# Altium PCB MachNhan.PcbDoc
Units mil, origin at the board's own origin, x right, y up, seen from the top; angles counter-clockwise.
Board outline 3185.03 x 3296.15 mil, 2 copper layers (Top Layer, Bottom Layer); 54 components, 34 nets, 165 pads, 26 vias.
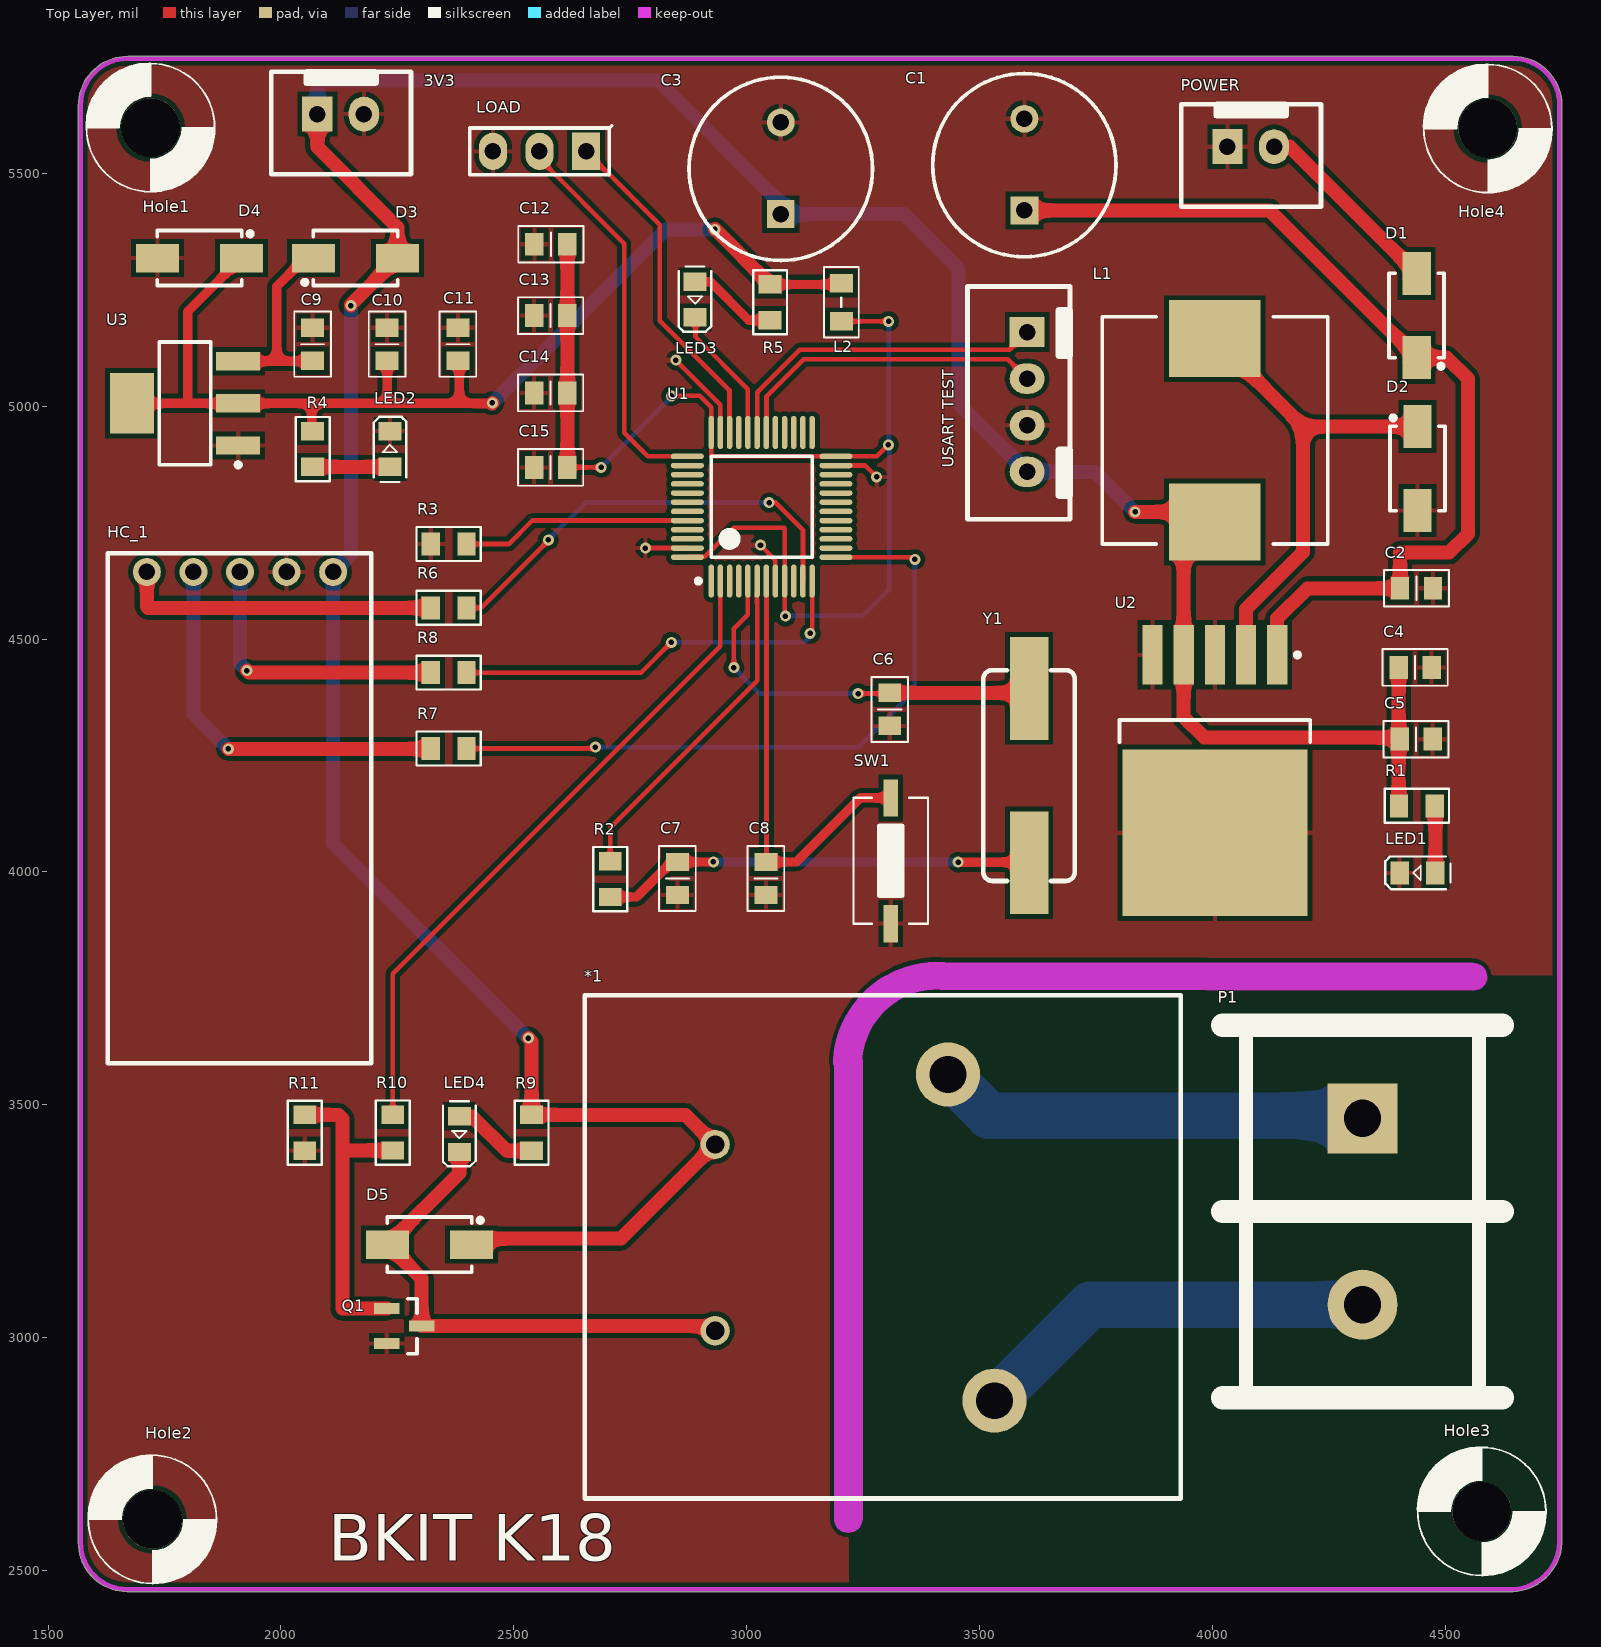
[diagram p0: Top Layer view]
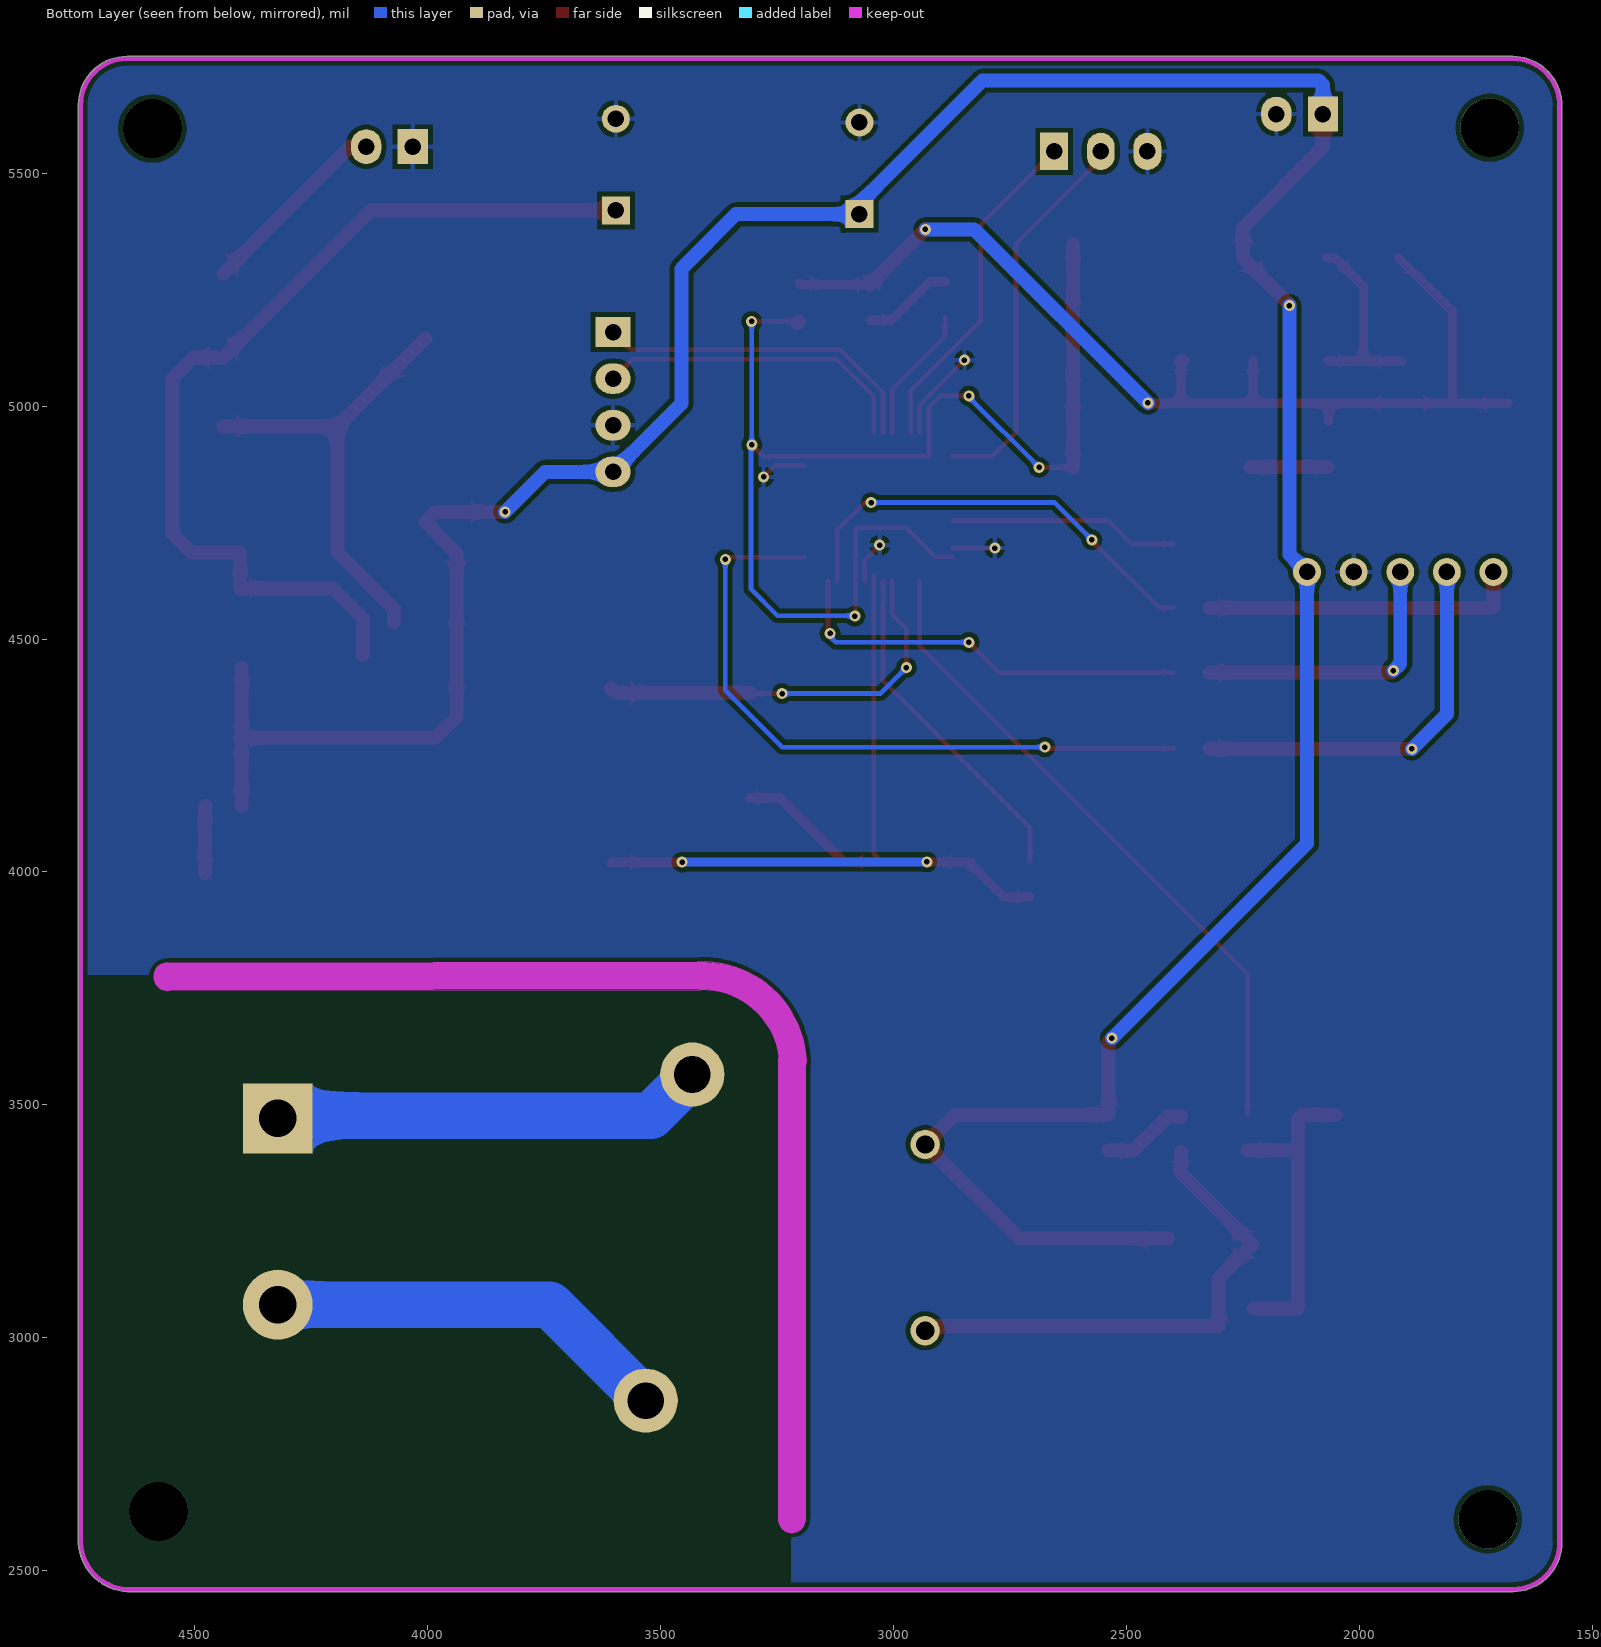
[diagram p1: Bottom Layer view, seen from below]
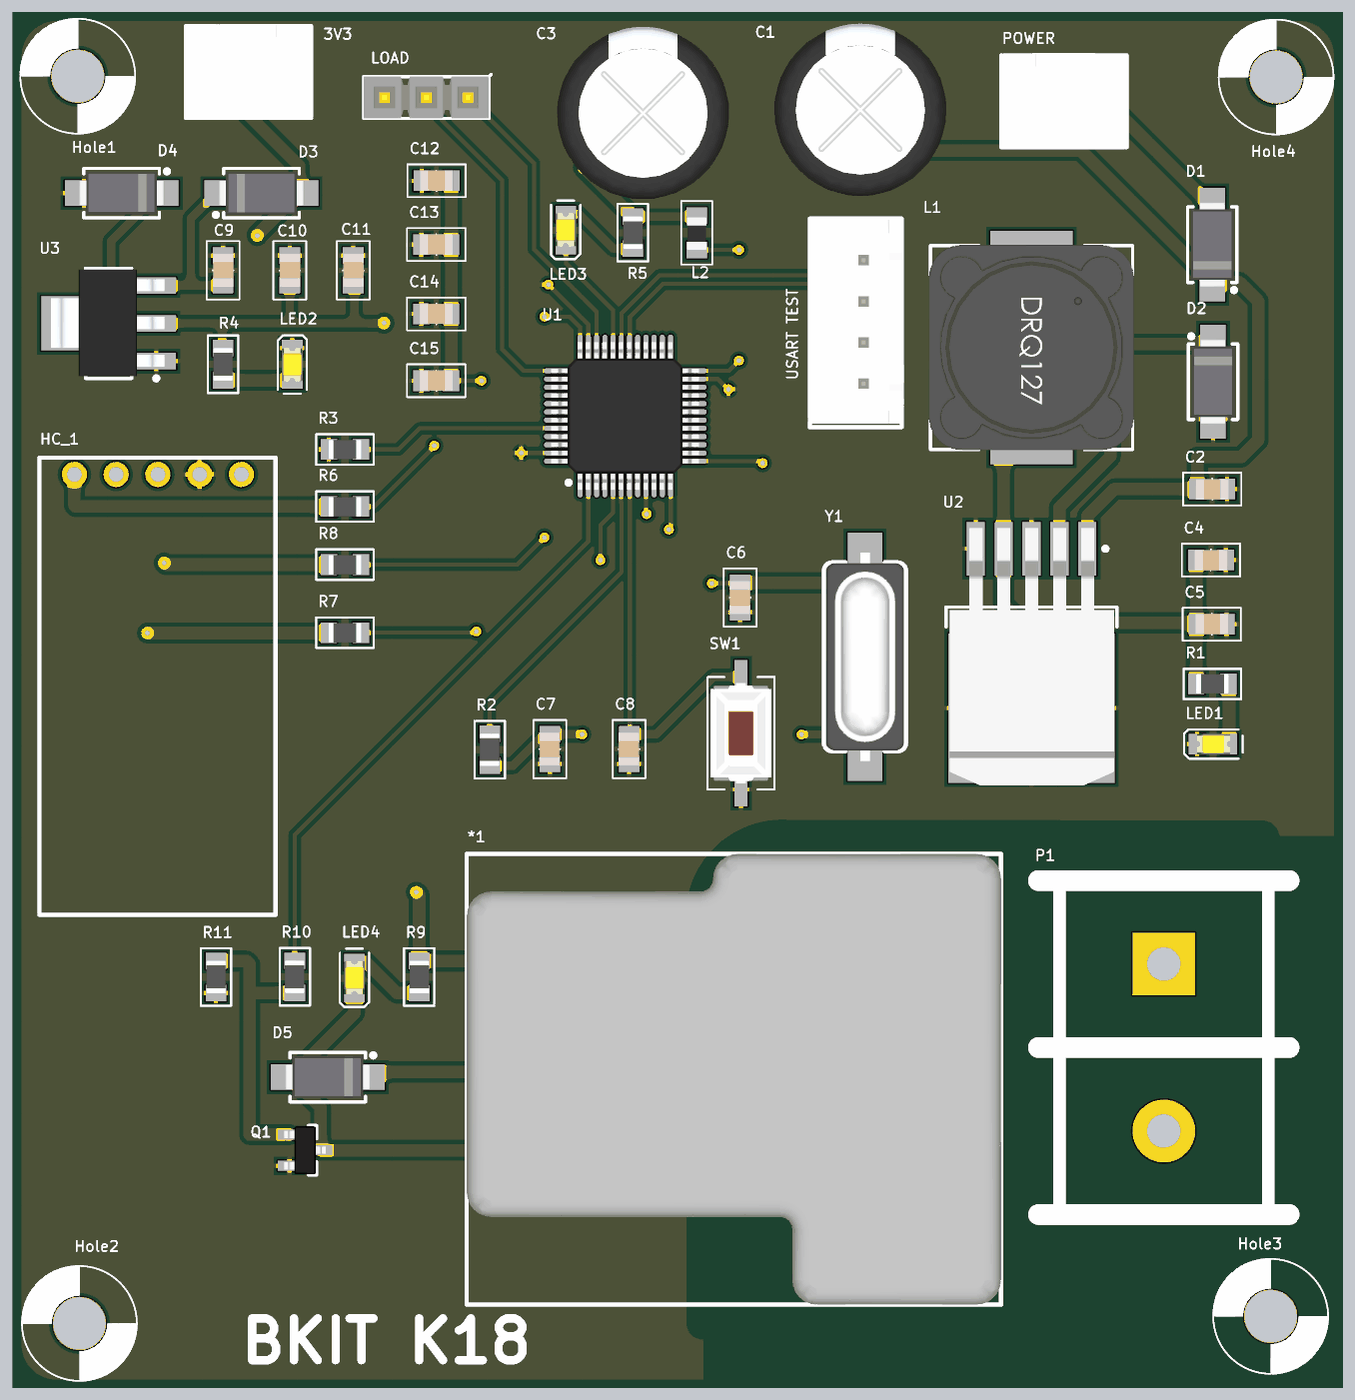
[diagram p2: 3D render of the assembled board from above, using the file's embedded part models]

## Layer stack, top to bottom
Top Solder: solder mask 0.4, Solder Resist, Dk 3.5
Top Layer: signal copper 1.4
Dielectric 1: dielectric 12.6, FR-4, Dk 4.8
Bottom Layer: signal copper 1.4
Bottom Solder: solder mask 0.4, Solder Resist, Dk 3.5

## Board outline
1670,2454.99 cw(c1670,2560) 1564.98,2560 1564.98,5645 cw(c1671,5645) 1671,5751.02 4645,5751.02 cw(c4645,5646) 4750.01,5646 4750.02,2560 cw(c4745,2560) 4750.01,2559.76 cw(c4640,2565) 4645.24,2454.99 cw(c4640,2565) 4634.88,2454.99
cut-out: 3188.46,3583.57 cw(c3216,3594.25) 3186.5,3595.87 cw(c3409.37,3583.63) 3420.91,3806.54 4559.05,3804.54 cw(c4559,3775) 4588.54,3775 cw(c4559,3775) 4558.95,3745.46 3416.95,3747.46 cw(c3417,3777) 3413.18,3747.7 ccw(c3409.37,3583.63) 3246.43,3603.28 cw(c3218,3595.25) 3247.54,3595.25 3247.54,2611 cw(c3218,2611) 3188.46,2611

## Design rules (kind name [scope] priority, off if disabled: settings)
Clearance [All] p1: gap=10 ignorepadtopadclearanceinfootprint=FALSE except(0: Arc-Hole Track-Hole SMDPad-Hole THPad-Hole Via-Hole Fill-Hole Poly-Hole Region-Hole Text-Hole; 5: SMDPad-SMDPad SMDPad-THPad; 8: Arc-Arc Arc-Track Arc-SMDPad Track-Track Track-SMDPad)
PolygonConnect [All] p1: connectstyle=Relief reliefconductorwidth=10 reliefentries=4 polygonreliefangle="90 Angle" airgapwidth=10
RoutingVias [All] p1: holewidth=11.81 width=23.62 viastyle="Through Hole" minholewidth=11.81 minwidth=23.62 maxholewidth=11.81 maxwidth=23.62
SolderMaskExpansion [All] p1: expansion=4
Width [All] p1: maxlimit=30 minlimit=10 preferedwidth=10
30 further rules are at their usual default settings.

## Components (designator, comment, footprint, x,y, rotation, side; value= is the part's Value field where it differs from the comment)
3V3 "JP2" "CON Header 2" 2278,5627 r0 top value="Connector 2"
*1 "Relay_4Pin" "Relay4 - duplicate" 3132,2515 r90 top
C1 "470uF/50V" CR/D.10.0x16.0/P.5.0 3596,5420.15 r90 top
C2 "100nF" "C 0805 (2012)" 4438.02,4609 r0 top
C3 "1000uF/16V" CR/D.10.0x12.5/P.5.0 3073,5412.15 r90 top
C4 "100nF" "C 0805 (2012)" 4434.97,4439 r0 top
C5 "100nF" "C 0805 (2012)" 4437.03,4285 r180 top
C6 "22pF" "C 0805 (2012)" 3307,4349 r270 top
C7 "22pF" "C 0805 (2012)" 2851,3986 r270 top
C8 "100nF" "C 0805 (2012)" 3041,3986 r270 top
C9 "10uF" "C 0805 (2012)" 2068,5133 r90 top
C10 "10uF" "C 0805 (2012)" 2228,5133 r90 top
C11 "100nF" "C 0805 (2012)" 2380,5133 r90 top
C12 "100nF" "C 0805 (2012)" 2579.45,5347.53 r180 top
C13 "100nF" "C 0805 (2012)" 2579,5194.53 r180 top
C14 "100nF" "C 0805 (2012)" 2579,5028.53 r180 top
C15 "10uF" "C 0805 (2012)" 2579,4868.53 r180 top
D1 "SS34" "DO-214AC (SMA)" 4438.02,5194.53 r270 top
D2 "SS34" "DO-214AC (SMA)" 4439.98,4866 r90 top
D3 "SS14" "DO-214AC (SMA)" 2160,5318 r180 top
D4 "SS14" "DO-214AC (SMA)" 1825,5318 r0 top
D5 "M7" "DO-214AC (SMA)" 2319,3200 r0 top
HC_1 "Header 5" HC_12 1412,4744 r270 top
Hole1 "3mm" SCREW/3M/7M 1720,5598 r0 top
Hole2 "3mm" SCREW/3M/7M 1724,2610 r0 top
Hole3 "3mm" SCREW/3M/7M 4578,2627 r0 top
Hole4 "3mm" SCREW/3M/7M 4591,5596 r0 top
L1 "100uH" "Inductor SMD 12x12x8" 4005,4948 r270 top value="150 mH"
L2 "600 Ohm" "Inductor SMD 0805 (2012)" 3203,5223 r90 top
LED1 "Red Led" "Led SMD 0805" 4441.03,3998 r180 top
LED2 "Blue Led" "Led SMD 0805" 2234,4907 r90 top
LED3 "Blue Led" "Led SMD 0805" 2889,5230 r270 top
LED4 "Blue Led" "Led SMD 0805" 2383,3438 r270 top
LOAD "Header 3" "Header 3" 2655,5547 r180 top
P1 "Header 2" "HDR Terminal 2" 4322,3471 r270 top
POWER "Header 2" "CON Header 2" 4232,5557 r0 top
Q1 "C1815" SOT-23 2264.6,3025 r0 top
R1 "10k" "R 0805 (2012)" 4438.61,4142 r180 top
R2 "330" "R 0805 (2012)" 2707,3984.55 r270 top
R3 "10k" "R 0805 (2012)" 2360,4704 r0 top
R4 "4k7" "R 0805 (2012)" 2068,4908 r90 top
R5 "2k2" "R 0805 (2012)" 3050,5223 r90 top
R6 "4.7k" "R 0805 (2012)" 2360,4567 r0 top
R7 "4.7k" "R 0805 (2012)" 2360,4265 r0 top
R8 "4.7k" "R 0805 (2012)" 2360,4428 r0 top
R9 "10k" "R 0805 (2012)" 2538,3440 r90 top
R10 "4k7" "R 0805 (2012)" 2240,3440.42 r270 top
R11 "47k" "R 0805 (2012)" 2051,3440 r90 top
SW1 "Button" SW/2/SMD 3309,4024 r90 top
U1 "STM32F103C8T6" LQFP48_N 3032,4784 r90 top
U2 "LM2596S-5.0" TO-263-5 4005,4217.97 r270 top
U3 "AMS1117-3V3" SOT-223 1794,5006 r90 top
"USART TEST" "Header 4" "CON Header 4" 3631,4960 r270 top
Y1 "8Mhz" "Crystal HC49US SMD" 3606,4207 r90 top

## Footprints (in the part's own frame and the unit in brackets; to place one, negate y for a bottom-side part, rotate by r counter-clockwise, add the part's x,y. Pads: shape width x height; smd on the part's side, far side on the other; paste and mask are expansions set on the pad)
"C 0805 (2012)" [mm] "Chip Capacitor, 2-Leads, Body 2.0x1.3mm, IPC Medium Density"
  rect 1x1.25 smd: 1(-0.9,0) 2(0.9,0)
  silkscreen extent -1.78,-1 1.78,1, body extent -1,-0.64 1,0.61, height 0.6
"CON Header 2" [mil]
  rect 65x75 hole 35.43: 1(-200,0)
  oval 65x75 hole 35.43: 2(-100,0)
  silkscreen extent -299,-129 1,96, body extent -297,-134 -2,94, height 286
"CON Header 4" [mil]
  rect 65x75 hole 35.43: 1(-199,-29)
  oval 65x75 hole 35.43: 2(-99,-29) 3(1,-29) 4(101,-29)
  silkscreen extent -297,-157 203,68, body extent -294,-162 195,64, height 290
CR/D.10.0x12.5/P.5.0 [mil]
  rect 60x60 hole 35.43: 1(0,0)
  round 60 hole 35.43: 2(196.85,0)
  silkscreen extent -100,-197 294,197, body extent -109,-208 304,205, height 551
CR/D.10.0x16.0/P.5.0 [mil]
  rect 60x60 hole 35.43: 1(0,0)
  round 60 hole 35.43: 2(196.85,0)
  silkscreen extent -100,-197 294,197, body extent -110,-206 304,208, height 689
"Crystal HC49US SMD" [mil]
  rect 220.47x82.67 smd: 1(-187,0) 2(187,0)
  silkscreen extent -226,-98 226,98, body extent -250,-93 250,92, height 165
"DO-214AC (SMA)" [mm] "Molded Diode, 2-Leads, Body 4.3x2.7mm, IPC Medium Density"
  rect 2.35x1.55 smd: 1(-2.286,0) 2(2.286,0)
  silkscreen extent -2.3,-1.5 2.89,1.5, body extent -2.6,-1.3 2.6,1.3, height 2.4
HC_12 [mil]
  round 60 hole 35.43: 1(100,700) 2(100,600) 3(100,500) 4(100,400) 5(100,300)
  silkscreen extent 60,216 1155,782
"HDR Terminal 2" [mil]
  rect 150x150 hole 80: 1(0,0)
  round 150 hole 80: 2(400,0)
  silkscreen extent -200,-300 600,300
"Header 3" [mil]
  rect 60x80 hole 35.43: 1(0,0)
  oval 60x80 hole 35.43: 2(100,0) 3(200,0)
  silkscreen extent -55,-55 250,50, body extent -50,-50 250,50, height 350
"Inductor SMD 12x12x8" [mm] "Precision Wire Wound Inductor, 2-Leads, Body 12.3x12.3mm, IPC Low Density"
  rect 4.2x5 smd: 1(-5,0) 2(5,0)
  silkscreen extent -6.2,-6.15 6.2,6.15, body extent -6.25,-6.25 6.25,6.25, height 8.01
"Inductor SMD 0805 (2012)" [mm] "Precision Wire Wound Inductor, 2-Leads, Body 2.0x1.2mm, IPC Medium Density"
  rect 1x1.25 smd: 1(-1.041,0) 2(1.041,0)
  silkscreen extent -1.92,-0.95 1.92,0.95, body extent -1.05,-0.6 0.95,0.6, height 0.95
"Led SMD 0805" [mm] "Led SMD 0805"
  rect 1x1.25 smd: 1(-0.95,0) 2(1,0)
  silkscreen extent -1.78,-0.89 1.78,0.89, body extent -1.01,-0.62 1.01,0.63, height 1.1
LQFP48_N [mm] "Thin QFP, 48-Leads, Body 7x7mm, Pitch 0.5mm, IPC Medium Density"
  oval 1.8x0.3 smd: 1(-4.05,2.75) 2(-4.05,2.25) 3(-4.05,1.75) 4(-4.05,1.25) 5(-4.05,0.75) 6(-4.05,0.25) 7(-4.05,-0.25) 8(-4.05,-0.75) 9(-4.05,-1.25) 10(-4.05,-1.75) 11(-4.05,-2.25) 12(-4.05,-2.75) 25(4.05,-2.75) 26(4.05,-2.25) 27(4.05,-1.75) 28(4.05,-1.25) 29(4.05,-0.75) 30(4.05,-0.25) 31(4.05,0.25) 32(4.05,0.75) 33(4.05,1.25) 34(4.05,1.75) 35(4.05,2.25) 36(4.05,2.75)
  oval 0.3x1.8 smd: 13(-2.75,-4.05) 14(-2.25,-4.05) 15(-1.75,-4.05) 16(-1.25,-4.05) 17(-0.75,-4.05) 18(-0.25,-4.05) 19(0.25,-4.05) 20(0.75,-4.05) 21(1.25,-4.05) 22(1.75,-4.05) 23(2.25,-4.05) 24(2.75,-4.05) 37(2.75,4.05) 38(2.25,4.05) 39(1.75,4.05) 40(1.25,4.05) 41(0.75,4.05) 42(0.25,4.05) 43(-0.25,4.05) 44(-0.75,4.05) 45(-1.25,4.05) 46(-1.75,4.05) 47(-2.25,4.05) 48(-2.75,4.05)
  silkscreen extent -4.17,-2.75 2.75,3.57, body extent -4.5,-4.47 4.5,4.53, height 1.6
"R 0805 (2012)" [mm] "Chip Resistor, 2-Leads, Body 2.0x1.3mm, IPC Medium Density"
  rect 1x1.25 smd: 1(-0.975,0) 2(0.975,0)
  silkscreen extent -1.75,-0.92 1.75,0.92, body extent -1,-0.61 1,0.59, height 0.5
"Relay4 - duplicate" [mm]
  round 1.6 hole 1: 1(22.86,5.08) 2(12.7,5.08)
  round 3.5 hole 2: 3(26.67,-7.62) 4(8.89,-10.16)
  silkscreen extent 3.56,-20.32 30.99,12.19, body extent 3.56,-20.32 30.99,12.19, height 2.21
SCREW/3M/7M [mm]
  round 3.2 hole 3.2: 1(0,0)
  silkscreen extent -3.54,-3.53 3.53,3.54
SOT-23 [mm] "SOT23, 3-Leads, Body 3.0x2.5mm (max), Pitch 0.95mm, IPC Medium Density"
  rect 1.4x0.6 smd: 1(-0.95,0.95) 2(-0.95,-0.95) 3(0.95,0)
  silkscreen extent 0.2,-1.5 0.7,1.5, body extent -1.28,-1.46 1.27,1.46, height 0.95
SOT-223 [mm] "SOT223, 4-Leads, Body 6.5x3.5mm, Pitch 2.3mm, Lead Span 7mm, IPC Medium Density"
  rect 1x2.4 smd: 1(-2.3,-2.9) 2(0,-2.9) 3(2.3,-2.9)
  rect 3.3x2.4 smd: 2(0,2.9)
  silkscreen extent -3.47,-3.03 3.35,1.4, body extent -3.23,-3.39 3.27,3.5, height 1.72
SW/2/SMD [mil]
  rect 80x31.5 smd: 1(-135,0) 2(135,0)
  silkscreen extent -135,-80 135,80, body extent -120,-73 120,73, height 98
TO-263-5 [mm] "D2-PAK, 6-Pads, Body 8.9x10.4mm (max), IPC Medium Density"
  rect 3.25x1.1 smd: 1(-6.3,3.4) 2(-6.3,1.7) 3(-6.3,0) 4(-6.3,-1.7) 5(-6.3,-3.4)
  rect 9.1x10.1 smd: 6(3.4,0)
  silkscreen extent -6.42,-5.2 -1.55,5.2, body extent -7.56,-4.98 8.11,5.02, height 4.83

## Part data
3V3: library part Con2, "Connector 2"
C1 C3: library part Capacitor, "Capacitor pol"
C2 C4 C5 C6 C7 C8 C9 C10 C11 C12 C13 C14 C15: library part "Capacitor NP", "Capacitor non-pol"
D1 D2 D3 D4: library part "Diode Schottky", "Schottky Diode", Code_JEDEC=DO-214-AA, LatestRevisionDate=17-Jul-2002, LatestRevisionNote="Re-released for DXP Platform.", PackageReference=SMB, Published=8-Jun-2000, Publisher="Altium Limited"
D5: library part Diode, "Default Diode", Code_JEDEC=DO-214-AB, LatestRevisionDate=17-Jul-2002, LatestRevisionNote="Re-released for DXP Platform.", PackageReference=SMC, PackageVersion=Sep-1996, Published=8-Jun-2000, Publisher="Altium Limited"
HC_1: library part HC_12, "Header, 5-Pin", LatestRevisionDate=17-Jul-2002, LatestRevisionNote="Re-released for DXP Platform.", Publisher="Altium Limited"
Hole1 Hole2 Hole3 Hole4: library part Screw
L1: library part L1, "Inductor"
L2: library part Inductor, "Inductor"
LED1 LED2 LED3 LED4: library part Led, "Typical LED"
LOAD: "Header, 3-Pin"
P1 POWER: "Header, 2-Pin", LatestRevisionDate=17-Jul-2002, LatestRevisionNote="Re-released for DXP Platform.", Publisher="Altium Limited"
Q1: library part "Transistor NPN", "NPN Bipolar Transistor"
R1 R2 R3 R4 R5 R6 R7 R8 R9 R10 R11: library part Resistor, "Resistor", LatestRevisionDate=17-Jul-2002, LatestRevisionNote="Re-released for DXP Platform.", PackageReference=AXIAL-0.3, Published=8-Jun-2000, Publisher="Altium Limited"
SW1: library part "SW SPST", "Tact switch 2 pin"
U1: "STM32 ARM-based 32-bit MCU with 64 Kbytes Flash, 48-pin LQFP, Industrial Temperature", ComponentLink1Description="Manufacturer Link", ComponentLink1URL=www.st.com/stm32, ComponentLink2Description=Datasheet, ComponentLink2URL=http://www.st.com/stonline/products/literature/ds/13587.pdf, DatasheetVersion="rev6, Mar-2008", PackageDescription="48-Pin Low-Profile Quad Flat Pack, 7 x 7 mm Body, 0.5 mm Pitch (LQFP48)", PackageReference=LQFP48, PackageVersion=Mar-2008, Published=30-May-2008, Publisher="Altium Limited"
U2: library part LM2576/96, "SIMPLE SWITCHER® 3A Step-Down Voltage Regulator"
U3: library part AMS1117, "1A LDO Voltage Regulator, ADJ or fixed 1.5/1.8/2.5/2.85/3.3/5V"
"USART TEST": "Header, 4-Pin"
Y1: library part Crystal

## Via types
v1: diameter 23.62, hole 11.81, Top Layer to Bottom Layer, 26 vias

## Nets (pads, with @x,y where several pads share a name; then routed paths per layer and width w, separated by ;. In a path a pad name is that pad's centre, name@x,y a point inside that pad or via, vN(x,y) a via of type N, cw(c..) or ccw(c..) an arc to the next point about the centre after c; other vN are vias at no path point)
3V3: C10.1 C11.1 D4.2 L2.2 R4.2 R5.2 U3.2 | length 2302.1
  Top Layer w20: U3.2@1679.83,5006 1908.17,5006 2066,5006 ; 1800,5015 1800,5203 D4.2 ; 2066,4967.39 2066,5006 ; C10.1 2228,5006 ; C11.1@2382.88,5094.69 2382.88,5006 ; v1@2453,5006 2382.88,5006 ; R5.2 3200.39,5261.39 L2.2 ; 2066,5006 2228,5006 ; 2228,5006 2382.88,5006
  Top Layer w30: C11.1 C11.1@2382.88,5094.69 ; v1@2453,5006 v1(2454,5007) ; v1(2931.39,5379.61) 2931.39,5380 R5.2
  Bottom Layer w30: v1(2454,5007) 2826.61,5379.61 v1(2931.39,5379.61)
9V: D1.1 POWER.2 | length 418.9
  Top Layer w30: POWER.2 4165.54,5557 D1.1
DEBUG_LED: LED3.2 U1.32 | length 335.8
  Top Layer w10: U1.32 3002.47,5036.53 2890,5149 ; 2890,5149 2890,5189.61 LED3.2 2890,5149
GND: 3V3.2 "USART TEST.3" C1.2 C2.2 C3.2 C4.2 C5.1 C6.2 C7.2 C8.2 C9.2 C10.2 C11.2 C12.2 C13.2 C14.2 C15.2 D2.1 D4.1 HC_1.2 LED1.2 LED2.2 LOAD.3 POWER.1 Q1.2 R3.1 R11.1 SW1.1 U1.8 U1.23 U1.35 U1.47 U2.3 U2.5 U2.6 U3.1 | length 472.8
  Top Layer w10: v1(2782.58,4695.42) U1.47 ; v1(2847.73,5098.73) 2943.42,5003.04 U1.35 ; v1(3029.5,4701.5) 3061.53,4669.47 U1.8 ; U1.23 3254.42,4872.58 v1(3279,4848)
HC_12_RX: R8.2 U1.12 | length 891
  Top Layer w10: R8.2 2773,4428 v1(2838,4493) ; v1(3136.17,4512) 3140.58,4516.42 U1.12@3140.58,4624.55
  Bottom Layer w10: v1(2838,4493) 3124,4493 3136.17,4505.17 v1(3136.17,4512)
HC_12_SET: R6.2 U1.11 | length 951.1
  Top Layer w10: R6.2 2430,4567 2574,4711 v1(2574,4713) ; v1(3048,4793) 3062,4793 3120.58,4734.42 U1.11
  Bottom Layer w10: v1(2574,4713) 2654,4793 v1(3048,4793)
HC_12_TX: R7.2 U1.13 | length 1466.9
  Top Layer w10: R7.2 2672,4265 v1(2675,4268) ; U1.13 3356.27,4675.73 v1(3361,4671)
  Bottom Layer w10: v1(2675,4268) 3239,4268 3361,4390 v1(3361,4671)
Net*1_2: *1.2 D5.1 LED4.2 Q1.3 | length 1101.8
  Top Layer w30: LED4.2 2383,3354 D5.1 2302,3127 Q1.3 2922,3025 *1.2
Net*1_3: *1.3 P1.1 | length 941.8
  Top Layer w100: P1.1@4302,3477 P1.1@4327,3452
  Bottom Layer w100: *1.3 3520,3477 P1.1@4302,3477
Net*1_4: *1.4 P1.2 | length 888.7
  Top Layer w100: *1.4@3532,2861 3533.2,2861.4 *1.4@3538,2863 ; P1.2 P1.2@4329,3071
  Bottom Layer w100: *1.4 3738,3071 P1.2
NetC6_1: C6.1 U1.5 Y1.2 | length 859.7
  Top Layer w10: v1(2972.28,4438.72) 2972.28,4522 3002.47,4552.19 U1.5 ; v1(3239,4383) 3305.57,4383 C6.1
  Top Layer w30: C6.1 3596.43,4384.43 Y1.2
  Bottom Layer w10: v1(2972.28,4438.72) 3028,4383 v1(3239,4383)
NetC7_1: C7.1 R2.2 Y1.1 | length 930.8
  Top Layer w20: R2.2 2763.16,3946.16 2838.43,4021.43 C7.1 v1(2928.57,4021.43) ; v1(3454,4021) 3605,4021 Y1.1
  Bottom Layer w20: v1(2928.57,4021.43) 3453.57,4021.43 v1(3454,4021)
NetC8_1: C8.1 SW1.2 U1.7 | length 936.3
  Top Layer w10: C8.1@3032.72,4029.72 3042.47,4039.47 U1.7@3042.47,4637
  Top Layer w20: C8.1 3106,4021.43 3243.57,4159 SW1.2
NetC9_1: C9.1 D3.2 U3.3 | length 425
  Top Layer w20: U3.3 1991,5096.55 ; C9.1 2066.98,5096.55 1991,5096.55 ; D3.2 2052,5318 1991,5257 1991,5096.55
NetD2_2: D2.2 L1.1 U2.2 | length 983.8
  Top Layer w30: L1.1 4193.85,4956 ; 4071.93,4535.95 4071.93,4564.93 4193.85,4686.85 4193.85,4956 ; D2.2 4193.85,4956
NetHC_1_3: HC_1.3 R8.1 | length 614.5
  Top Layer w30: v1(1927,4432) 1931,4428 R8.1
  Bottom Layer w30: HC_1.3 1912,4447 v1(1927,4432)
NetHC_1_4: HC_1.4 R7.1 | length 846.1
  Top Layer w30: v1(1887,4264) 2320.61,4264 R7.1
  Bottom Layer w30: HC_1.4 1812,4339 v1(1887,4264)
NetHC_1_5: HC_1.5 R6.1 | length 684.9
  Top Layer w30: HC_1.5 1712,4570 1715,4567 R6.1
NetLED1_1: LED1.1 R1.1 | length 144.6
  Top Layer w30: R1.1 4478.42,4140.58 LED1.1
NetLED2_1: LED2.1 R4.1 | length 166
  Top Layer w30: R4.1 LED2.1
NetLED3_1: LED3.1 R5.1 | length 195.3
  Top Layer w20: LED3.1 2921.61,5267.39 3004.39,5184.61 R5.1
NetLED4_1: LED4.1 R9.1 | length 185.6
  Top Layer w30: LED4.1 2410.61,3475.39 2484.39,3401.61 R9.1
NetQ1_1: Q1.1 R10.2 R11.2 | length 696.5
  Top Layer w30: R11.2 2123.61,3478.39 2132,3470 2132,3405 ; Q1.1 2132,3062.4 2132,3405 ; R10.2 2134.96,3402.04 2132,3405
NetR2_1: R2.1 U1.6 | length 733.2
  Top Layer w10: R2.1 2707,4095 3022.47,4410.47 3022.47,4574.94 3022.46,4576.85 3021.94,4577.37 3021.94,4584.83 3021.78,4584.99 3021.78,4585.57 3021.6,4585.75 3021.6,4586.15 3021.39,4586.35 3021.39,4598.98 3022.47,4600.06 U1.6@3022.47,4624.55
NetR3_2: R3.2 U1.44 | length 495.1
  Top Layer w10: R3.2 2489,4704 2539.47,4754.47 U1.44
OUTPUT_RELAY: R10.1 U1.2 | length 1437.1
  Top Layer w10: R10.1 2240,3781 2943.42,4484.42 U1.2
SWCLK: LOAD.1 U1.34 | length 731.2
  Top Layer w10: LOAD.1 2813,5389 2813,5183.61 2963.1,5033.51 U1.34
SWDIO: LOAD.2 U1.37 | length 836
  Top Layer w10: LOAD.2 2555,5531 2737,5349 2737,4943 2787.73,4892.27 U1.37
USART1_RX: "USART TEST.1" U1.31 | length 719.2
  Top Layer w10: U1.31@3022.47,4943.45 3022.47,5029.47 3114,5121 3564,5121 3602,5159
USART1_TX: "USART TEST.2" U1.30 | length 687.7
  Top Layer w10: U1.30@3042.47,4943.45 3042.47,5021.19 3122.28,5101 3560,5101 3602,5059
VBAT: U1.1
VCC: 3V3.1 "USART TEST.4" *1.1 C3.1 C4.1 C5.2 D3.1 D5.2 HC_1.1 L1.2 R1.2 R9.2 U2.4 | length 7276.6
  Top Layer w30: 3V3.1 2078,5556 2250,5384 D3.1 2150,5218 v1(2150,5216) ; D5.2@2411,3212.74 2729.74,3212.74 *1.1 2868.61,3478.39 R9.2 2538,3636 v1(2531,3643) ; v1(3834,4773) 3983.15,4773 L1.2 3938.07,4684.22 U2.4 3938.07,4332.93 3982.76,4288.24 C5.2@4399.54,4288.24 ; C4.1 C5.2@4399.54,4288.24 ; R1.2 4399.54,4142.69 C5.2@4399.54,4288.24 ; C5.2 4401.6,4288.24 C5.2@4399.54,4288.24
  Bottom Layer w30: 3V3.1 2078,5690 2087,5699 2809,5699 3073,5435 C3.1 3337.85,5412.15 3455,5295 3455,5006 3602,4859 3748,4859 v1(3834,4773) ; v1(2150,5216) 2150,4682 HC_1.1 2112,4061 2530,3643 v1(2531,3643)
VDD: C12.1 C13.1 C14.1 C15.1 L2.1 U1.9 U1.24 U1.36 U1.48 | length 2716.1
  Top Layer w10: C15.1 v1(2687.47,4868.53) ; v1(2838,5022) 2899,5022 2923.73,4997.27 U1.36 2923.73,4892.27 U1.24 3279.27,4892.27 v1(3304,4917) ; U1.48 2873.33,4676.51 2909.91,4676.51 2972.4,4739 3080.43,4739 3081.53,4737.91 U1.9 ; U1.9@3080.43,4625.33 U1.9 ; v1(3083,4549) 3081.21,4550.79 U1.9 ; L2.1 v1(3304.57,5182)
  Top Layer w30: C15.1 2614.89,4868.98 C12.1 ; L2.1 L2.1@3207,5178
  Bottom Layer w10: v1(2687.47,4868.53) 2838,5019.06 v1(2838,5022) ; v1(3083,4549) 3084,4550 3249,4550 3305.81,4606.81 3305.81,4915.19 v1(3304,4917) 3304.57,4917.57 v1(3304.57,5182)
VIN: C1.1 C2.1 D1.2 U2.1 | length 2042.1
  Top Layer w30: C1.1 4122.39,5420.15 D1.2 4502.47,5104.53 4548,5059 4548,4726 4507.58,4685.58 4402.58,4685.58 C2.1 4203.72,4609 4138.86,4544.14 U2.1
pads on no net: Hole1.1 Hole2.1 Hole3.1 Hole4.1 U1.3 U1.4 U1.10 U1.14 U1.15 U1.16 U1.17 U1.18 U1.19 U1.20 U1.21 U1.22 U1.25 U1.26 U1.27 U1.28 U1.29 U1.33 U1.38 U1.39 U1.40 U1.41 U1.42 U1.43 U1.45 U1.46

## Polygon pours and split planes (outlines as drawn)
GND on Bottom Layer (solid, pour order 20): 1573,5746 1571,5744 1571,2460 4743,2460 4745,2458 4747,2460 4747,5746
no net on Bottom Layer (solid, pour order 18): 1564,5742
no net on Bottom Layer (solid, pour order 16): 1579,5746
GND on Top Layer (solid, pour order 22): 1569,5746 1569,2462 1574,2457 4746,2457 4746,5743 4744,5745

## Keep-outs
Keep-Out Layer:
  lines w10: 4635,2460 ccw(c4640,2565) 4745,2560 4745,5646 ccw(c4645,5646) 4645,5746 1671,5746 ccw(c1671,5645) 1570,5645 1570,2560 ccw(c1670,2560) 1670,2460 4645,2460
  lines w59.06: 3216,3594.25 cw(c3409.37,3583.63) 3420,3777 ; 3218,2611 3218,3595.25 ; 3417,3777 4559,3775

## Other copper
Top Layer:
  pour cut-out: 3219,2462 3219,3670.64 3326.36,3778 4746.91,3778 4747,3777.91 4746,3776.91 4746,2457
Bottom Layer:
  pour cut-out: 3219,2461 3219,3668 3330,3779 4744,3779 4745,3780 4745,2458

## Silkscreen, mask and mechanical layers (free items; w line width, h text height)
Top Overlay:
  text "BKIT K18" at 2101,2521 h100